# Altium PCB Mini_Piano_V1.0.PcbDoc
Units mm, origin at the board's own origin, x right, y up, seen from the top; angles counter-clockwise.
Board outline 84.84 x 35.94 mm, 2 copper layers (Top Layer, Bottom Layer); 24 components, 16 nets, 73 pads, 0 vias.
Unrouted connection lines stored in the file: 17.
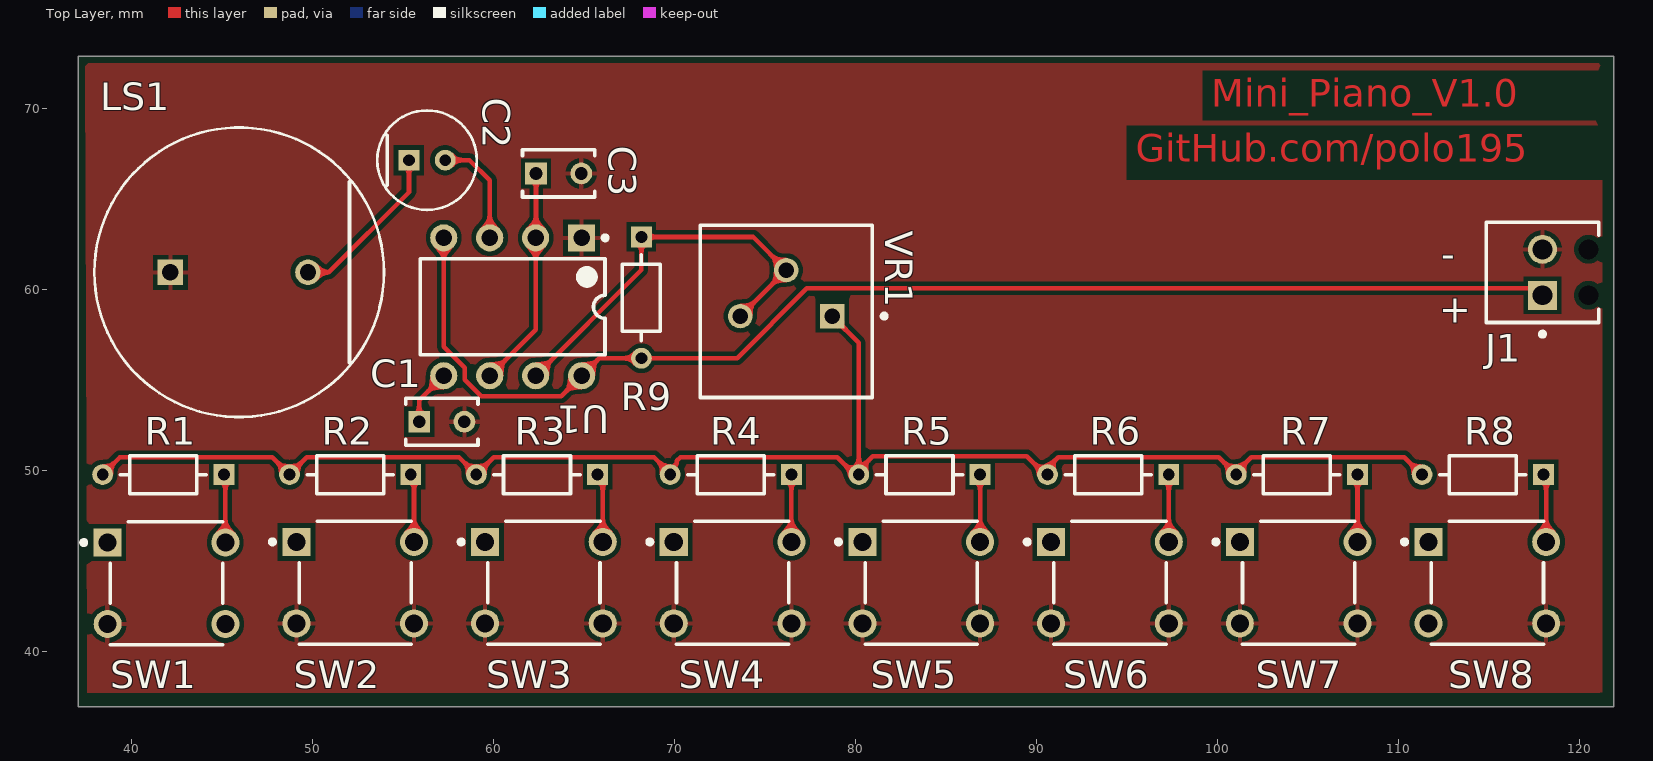
[diagram p0: Top Layer view]
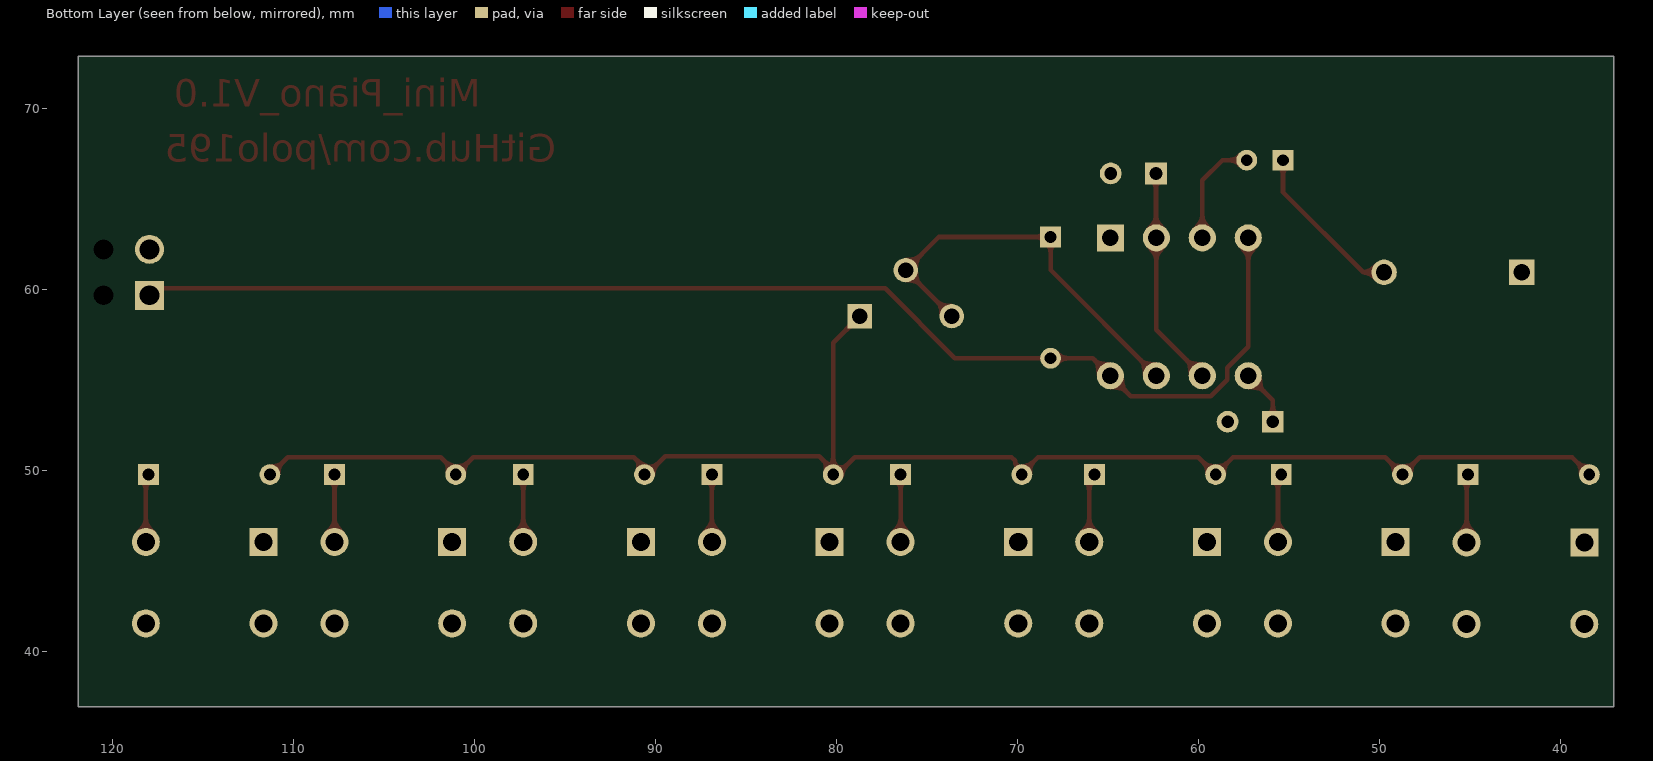
[diagram p1: Bottom Layer view, seen from below]
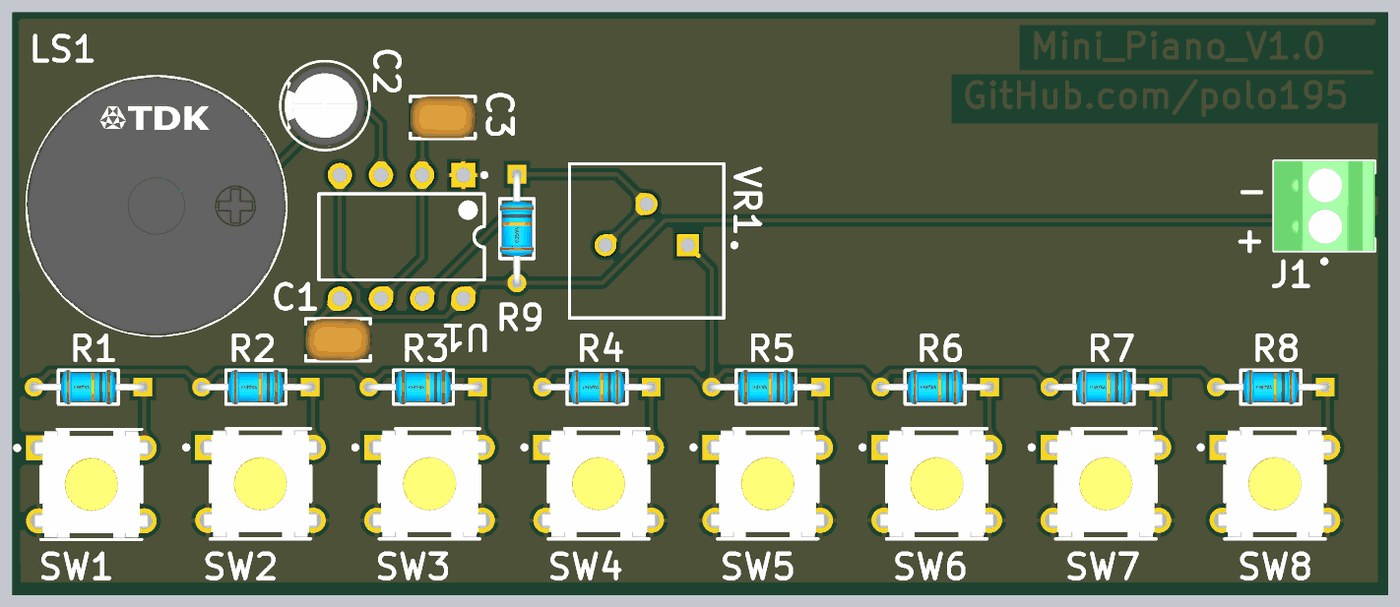
[diagram p2: 3D render of the assembled board from above, using the file's embedded part models]

## Layer stack, top to bottom
Top Solder: solder mask 0.0102, Solder Resist, Dk 3.5
Top Layer: signal copper 0.0356
Dielectric 1: dielectric 0.32, FR-4, Dk 4.8
Bottom Layer: signal copper 0.0356
Bottom Solder: solder mask 0.0102, Solder Resist, Dk 3.5

## Board outline
37.084,36.957 121.92,36.957 121.92,72.898 37.084,72.898

## Design rules (kind name [scope] priority, off if disabled: settings)
Clearance [All] p1: gap=0.254 ignorepadtopadclearanceinfootprint=FALSE
PolygonConnect [All] p1: connectstyle=Relief reliefconductorwidth=0.254 reliefentries=4 polygonreliefangle="90 Angle" airgapwidth=0.254
RoutingVias [All] p1: holewidth=0.711 width=1.27 viastyle="Through Hole" minholewidth=0.711 minwidth=1.27 maxholewidth=0.711 maxwidth=1.27
SolderMaskExpansion [All] p1: expansion=0.102 istentingtop=FALSE
SupplyNets "Schematic Supply Nets_1" [InNet('VCC')] p1: voltage=0.000
SupplyNets "Schematic Supply Nets" [InNet('GND')] p2: voltage=0.000
Width [All] p1: maxlimit=0.254 minlimit=0.254 preferedwidth=0.254
30 further rules are at their usual default settings.

## Components (designator, comment, footprint, x,y, rotation, side; value= is the part's Value field where it differs from the comment)
C1 "10nF" FP-K221K15X7RF5TL2-MFG 57.17,52.705 r0 top
C2 "10uF" FP-RAD-TH-D_5_0_5-L_7_1-F-MFG 56.358,67.155 r0 top
C3 "0.1uF" FP-K221K15X7RF5TL2-MFG 63.627,66.421 r0 top
J1 "1725656" PHOE-1725656-2 117.983,60.96 r90 top
LS1 "SD1614T5-B1" FP-SD1614T5-B1-MFG 45.974,60.96 r0 top
R1 "27k" FP-MFR-12-MFG 41.783,49.784 r180 top
R2 "24k" FP-MFR-12-MFG 52.106,49.784 r180 top
R3 "22k" FP-MFR-12-MFG 62.43,49.784 r180 top
R4 "20k" FP-MFR-12-MFG 73.136,49.784 r180 top
R5 "18k" FP-MFR-12-MFG 83.561,49.784 r180 top
R6 "16k" FP-MFR-12-MFG 93.986,49.784 r180 top
R7 "14k" FP-MFR-12-MFG 104.41,49.784 r180 top
R8 "13k" FP-MFR-12-MFG 114.681,49.784 r180 top
R9 "1k" FP-MFR-12-MFG 68.199,59.563 r270 top
SW1 "B3W-1022" FP-B3W-1022-MFG 41.962,43.779 r180 top
SW2 "B3W-1022" FP-B3W-1022-MFG 52.387,43.815 r180 top
SW3 "B3W-1022" FP-B3W-1022-MFG 62.811,43.815 r180 top
SW4 "B3W-1022" FP-B3W-1022-MFG 73.236,43.815 r180 top
SW5 "B3W-1022" FP-B3W-1022-MFG 83.661,43.815 r180 top
SW6 "B3W-1022" FP-B3W-1022-MFG 94.086,43.815 r180 top
SW7 "B3W-1022" FP-B3W-1022-MFG 104.51,43.815 r180 top
SW8 "B3W-1022" FP-B3W-1022-MFG 114.935,43.815 r180 top
U1 "NE555P" P0008A 61.087,59.055 r270 top
VR1 "10k" VISH-M63P103KB30T607 76.2,58.801 r180 top

## Footprints (in the part's own frame and the unit in brackets; to place one, negate y for a bottom-side part, rotate by r counter-clockwise, add the part's x,y. Pads: shape width x height; smd on the part's side, far side on the other; paste and mask are expansions set on the pad)
FP-B3W-1022-MFG [mm]
  rect 1.55x1.55 hole 1 paste-2539.97 mask+0: 1(3.25,-2.25)
  round 1.55 hole 1 paste-2539.97 mask+0: 2(-3.25,-2.25) 3(3.25,2.25) 4(-3.25,2.25)
  silkscreen extent -3.1,-3.4 4.7,3.4, body extent -4.13,-3.5 4.13,3.5, height 0.25
FP-K221K15X7RF5TL2-MFG [mm]
  rect 1.2x1.2 hole 0.7 paste-2539.97 mask+0: 1(-1.25,0)
  round 1.2 hole 0.7 paste-2539.97 mask+0: 2(1.25,0)
  silkscreen extent -2,-1.3 2,1.3, body extent -2.1,-1.4 2.1,1.4, height 0.25
FP-MFR-12-MFG [mm]
  rect 1.15x1.15 hole 0.65 paste-2539.97 mask+0: 1(-3.35,0)
  round 1.15 hole 0.65 paste-2539.97 mask+0: 2(3.35,0)
  silkscreen extent -2.37,-1.05 2.37,1.05, body extent -4.03,-1.15 4.03,1.15, height 0.25
FP-RAD-TH-D_5_0_5-L_7_1-F-MFG [mm]
  rect 1.15x1.15 hole 0.65 paste-2539.97 mask+0: 1(-1,0)
  round 1.15 hole 0.65 paste-2539.97 mask+0: 2(1,0)
  silkscreen extent -2.75,-2.75 2.75,2.75, body extent -2.85,-2.85 2.85,2.85, height 0.25
FP-SD1614T5-B1-MFG [mm]
  rect 1.4x1.4 hole 0.9 paste-2539.97 mask+0: 1(-3.8,0)
  round 1.4 hole 0.9 paste-2539.97 mask+0: 2(3.8,0)
  silkscreen extent -8,-8 8,8, body extent -8.1,-8.1 8.1,8.1, height 0.25
P0008A [mm] "DIP, 8-Leads, Body 10.15x6.6mm, Pitch 2.54mm"
  rect 1.5x1.5 hole 0.9: 1(-3.81,3.81)
  round 1.5 hole 0.9: 2(-3.81,1.27) 3(-3.81,-1.27) 4(-3.81,-3.81) 5(3.81,-3.81) 6(3.81,-1.27) 7(3.81,1.27) 8(3.81,3.81)
  silkscreen extent -3.93,-5.1 2.65,5.24, body extent -3.95,-5.07 3.95,5.07, height 5.08
PHOE-1725656-2 [mm] "Connector, 2-Leads, Body 6.2x5.4mm, Pitch 2.54mm"
  rect 1.6x1.6 hole 1.1: 1(-1.27,0)
  round 1.6 hole 1.1: 2(1.27,0)
  round 0 hole 1.1 unplated: MH1(-1.27,-2.54) MH2(1.27,-2.54)
  silkscreen extent -3.54,-3.1 2.77,3.1, body extent -2.77,-3.1 2.77,3.1, height 9
VISH-M63P103KB30T607 [mm] "THD, 3-Leads, Body 9.52x9.52mm, Pitch 2.54mm"
  rect 1.35x1.35 hole 0.85: 1(-2.54,0.26)
  round 1.35 hole 0.85: 2(0,-2.28) 3(2.54,0.26)
  silkscreen extent -5.54,-4.76 4.76,4.76, body extent -4.76,-4.76 4.76,4.76, height 10.91

## Part data
C1 C3: library part CMP-00030-39474895-1, "K221K15X7RF5TL2 Multilayer Ceramic Capacitor, 220 pF, 50 V, ± 10%, X7R, Radial Leaded", Capacitance=220pF, Case/Package=Dipped, Dielectric=X7R, Dielectric Material=Ceramic, Max Operating Temperature=125°C, Min Operating Temperature=-55°C, Tolerance=10%, Voltage Rating=50V, Depth=2.6mm, Diameter=500µm, Height=4mm, Height - Seated (Max)=5.588mm, Lead Diameter=500µm, Lead Length=30mm, Lead Pitch=2.5mm, Lead/Base Style=Straight, Length=4mm, Mount="Through Hole", NexarPartId=39474895, Number of Pins=2, Packaging="Cut Tape", Radiation Hardening=No, REACH SVHC=Unknown, RoHS=Compliant, Termination=Radial, Thickness=2.6mm, Voltage Rating (DC)=50V, Weight=160.004709mg, Width=2.4892mm
C2: library part CMP-05427-000251-1, "Aluminum Electrolytic Capacitors (Radial Lead Type) 22uF ±20% 16V", Capacitance=22uF, Case/Package=Radial, Leakage Current=3.5uA, Max Operating Temperature=105°C, Min Operating Temperature=-55°C, Package Quantity=200, Ripple Current=50mA, Tolerance=20%, Voltage=16V, Construction=RADIAL, Diameter=5mm, Height=7mm, Height - Seated (Max)=0.276inch, Lead Diameter=0.45mm, Lead Pitch=2mm, Length=7mm, Life (Hours)=1000Hour, Mount="Through Hole", Packaging=Bulk, Polarity=Polar, Radiation Hardening=No, REACH SVHC="No SVHC", Ripple Current (AC)=50mA, RoHS Compliant=Yes, Series=GA, Termination=Radial, Voltage Rating=16V, Voltage Rating (DC)=16V
J1: library part CMP-2000-05299-1, "Male Header, Pitch 2.54 mm, 1 x 2 Position, Height 9 mm, Tail Length 3.5 mm", Colour=Green, Manufacturer="Phoenix Contact", Content=250pc(s), Datasheet URL=http://datasheet.octopart.com/1725656-Phoenix-Contact-datasheet-5302866.pdf, Datasheet Version=Apr-08, Industrial packaging=Yes, Manufacturer part No.=1725656, Manufacturer URL=http://www.phoenixcontact.com/, Number of Contacts=2, Pitch=2.54mm, Type=MPT0,5/2-2,54
LS1: library part CMP-08413-000012-1, "AUDIO MAGNETIC XDCR 3-6V TH", Frequency=2.048kHz, Max Operating Temperature=70°C, Max Supply Current=80mA, Min Operating Temperature=-10°C, Operating Supply Voltage=5V, Package Quantity=480, Self Resonant Frequency=2.05kHz, Diameter=16mm, Height=14mm, Mount="Through Hole", Number of Pins=2, Number of Terminals/Pins=2, Operating Supply Current=80mA, Packaging=Tray, Sensing Method=Magnetic, Series=SD, Termination="PC Pins", Voltage Rating (DC)=5V, Washable=No
R1 R2 R3 R4 R5 R6 R7 R8 R9: library part CMP-03413-000012-1, "RES MF 1/6W 1% AXIAL", Max Operating Temperature=155°C, Min Operating Temperature=-55°C, Power Rating=160mW, Resistance=10kR, Tolerance=1%, Voltage Rating=200V, Packaging="Ammo Pack", Termination=Axial, Voltage Rating (DC)=200V
SW1 SW2 SW3 SW4 SW5 SW6 SW7 SW8: library part CMP-08834-000055-1, "SWITCH TACTILE SPST-NO 0.05A 24V", Max Operating Temperature=70°C, Min Operating Temperature=-25°C, Operating Force=230gf, Ratings=IP67, Actuator Type=Standard, Illumination Type=Non-Illuminated, Mechanical Life=1000000Cycles, Mount="Through Hole", Packaging=Bulk, RoHS Compliant=Yes, Switch Function=Off-Mom, Switch Travel=0.25mm, Termination="PC Pin", Throw Configuration=SPST
U1: library part CMP-2000-04954-1, "Precision Timer, 4.5 to 16 V, 0 to 70 degC, 8-Pin DIP, Pb-Free, Tube", Manufacturer=TexasInstruments, Maximum High Level Output Current=-200mA, Maximum Low Level Output Current=200mA, Operating Supply Voltage=5, Package=8PDIP, Package Description="8-Pin Double In-line Package, Body 9.59 x 6.35 mm, Pitch 2.54 mm", Package Reference=P8, Category=Timer, Datasheet URL=http://www.ti.com/general/docs/lit/getliterature.tsp?genericPartNumber=NE555&fileType=pdf, Datasheet Version="Rev. I, 09/2014", Manufacturer URL=http://www.ti.com/, Number of Internal Timers=1, Package URL=http://www.ti.com/lit/ml/mpdi001b/mpdi001b.pdf, Packaging=Rail/Tube, Rad Hard=No, Type=Standard
VR1: library part CMP-1666-00012-6, "Single-Turn Cermet Trimmer, 10 KOhm, -55 to 125 degC, 3-Pin THD, RoHS, Bulk", Manufacturer="Vishay Semiconductor", ComponentLink1Description="Manufacturer URL", ComponentLink1URL=http://www.vishay.com/, ComponentLink2Description=Datasheet, ComponentLink2URL=http://120.52.73.14/www.mouser.com/ds/2/427/63-239923.pdf, DatasheetVersion=09/2015, Mounting Technology="Through Hole", PackageDescription="3-Pin Through Hole Device, Body 9.52 x 9.52 mm, Pitch 2.54 mm", PackageReference=M63P103KB30T607

## Nets (pads, with @x,y where several pads share a name; then routed paths per layer and width w, separated by ;. In a path a pad name is that pad's centre, name@x,y a point inside that pad or via, vN(x,y) a via of type N, cw(c..) or ccw(c..) an arc to the next point about the centre after c; other vN are vias at no path point)
GND: C1.2 C3.2 J1.2 LS1.1 SW1.3 SW2.3 SW2.4 SW3.3 SW3.4 SW4.3 SW4.4 SW5.3 SW5.4 SW6.3 SW6.4 SW7.3 SW7.4 SW8.4 U1.1
NetC1_1: C1.1 U1.5 | length 3.1
  Top Layer w0.254: C1.1 55.92,53.888 U1.5
NetC2_1: C2.1 LS1.2 | length 9.2
  Top Layer w0.254: LS1.2 50.927,60.96 55.358,65.391 C2.1
NetC2_2: C2.2 U1.3 | length 6.1
  Top Layer w0.254: C2.2 58.702,67.155 59.817,66.04 U1.3
NetC3_1: C3.1 U1.2 U1.6 | length 12.2
  Top Layer w0.254: U1.6 62.357,57.785 U1.2 62.377,62.885 C3.1
NetR1_1: R1.1 SW1.2 | length 3.8
  Top Layer w0.254: R1.1 45.212,49.705 SW1.2
NetR1_2: R1.2 R2.2 R3.2 R4.2 R5.2 R6.2 R7.2 R8.2 VR1.1 | length 88.2
  Top Layer w0.254: R1.2 39.389,50.74 47.8,50.74 R2.2 49.712,50.74 58.124,50.74 R3.2 60.036,50.74 68.894,50.74 R4.2@69.697,49.937 ; R4.2 69.786,50.026 70.158,50.398 70.158,50.539 70.359,50.74 79.012,50.74 79.968,49.784 R5.2 R5.2@80.211,50.026 ; VR1.1 80.211,57.07 R5.2@80.211,50.026 ; R8.2 111.3,49.784 110.344,50.74 101.881,50.74 101.167,50.026 101.06,50.026 R7.2 100.104,50.74 91.218,50.74 90.807,50.329 90.807,49.955 R6.2 90.505,49.784 89.489,50.8 80.984,50.8 R5.2@80.211,50.026
NetR2_1: R2.1 SW2.2 | length 3.8
  Top Layer w0.254: R2.1 55.637,49.604 SW2.2
NetR3_1: R3.1 SW3.2 | length 3.8
  Top Layer w0.254: R3.1 66.061,49.502 SW3.2
NetR4_1: R4.1 SW4.2 | length 3.7
  Top Layer w0.254: SW4.2 R4.1
NetR5_1: R5.1 SW5.2 | length 3.7
  Top Layer w0.254: SW5.2 R5.1
NetR6_1: R6.1 SW6.2 | length 3.7
  Top Layer w0.254: SW6.2 R6.1
NetR7_1: R7.1 SW7.2 | length 3.7
  Top Layer w0.254: SW7.2 R7.1
NetR8_1: R8.1 SW8.2 | length 3.8
  Top Layer w0.254: R8.1 118.185,49.63 SW8.2
NetR9_1: R9.1 U1.7 VR1.2 VR1.3 | length 22.4
  Top Layer w0.254: U1.7 68.199,61.087 R9.1 74.368,62.913 VR1.2 VR1.3
VCC: J1.1 R9.2 U1.4 U1.8 | length 70.9
  Top Layer w0.254: U1.4 57.277,56.844 58.432,55.69 58.432,55.031 59.349,54.114 63.766,54.114 U1.8 64.903,55.245 65.871,56.213 R9.2 73.485,56.213 77.343,60.071 117.602,60.071 J1.1
pads on no net: J1.MH1 J1.MH2 SW1.1 SW1.4 SW2.1 SW3.1 SW4.1 SW5.1 SW6.1 SW7.1 SW8.1 SW8.3

## Polygon pours and split planes (outlines as drawn)
GND on Top Layer "GND_L01_P000" (solid, pour order 0): 37.465,72.517 121.285,72.517 121.285,37.592 121.158,37.719 37.592,37.719

## Other copper
Top Layer:
  text "Mini_Piano_V1.0" at 99.695,70.104 h1.52
  text "GitHub.com/polo195" at 95.504,67.056 h1.52

## Silkscreen, mask and mechanical layers (free items; w line width, h text height)
Top Overlay:
  text "-" at 112.395,61.214 h1.52
  text "+" at 112.268,58.166 h1.52
Mechanical 1:
  the board outline again, w0.254